# EAGLE board Aquaponics Controller (EAGLE 6.1)
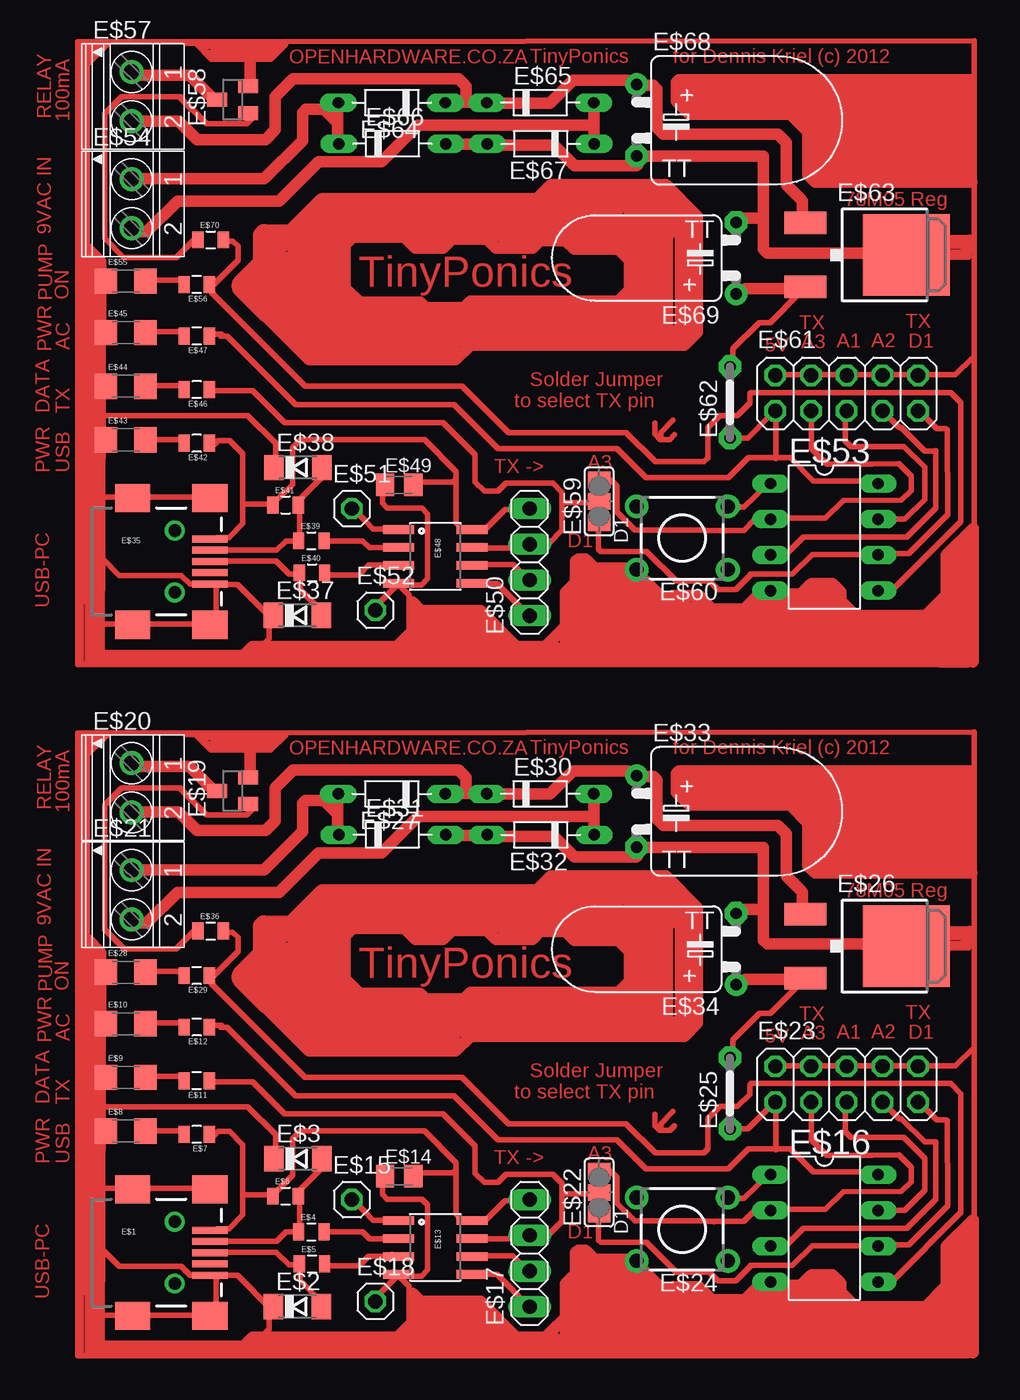
[diagram p0: board, top side]

No outline drawn. Coordinates in mm, seen from the top.
Copper layers (1*16): Top 0.035mm / dielectric 1.5mm / Bottom 0.035mm
Design rules: minimum track width 10mil, minimum drill 24mil, track to track 8mil, track to pad 8mil, pad to pad 8mil, via to via 8mil, smd to smd 8mil, copper to edge 40mil, drill to drill 8mil, minimum pad ring 10mil, minimum via ring 8mil, stop-mask expansion 4mil, vias tented up to drill 0mil, thermal gap 10mil

## Footprints (pad centres in the part's own frame; a part is rotated, then mirrored left to right if it is on the bottom)
USB-MINIB-NOSTOP = smd 2.5 x 0.5: D+ 2.5,0; D- 2.5,0.8; GND 2.5,-1.6; ID 2.5,-0.8; VBUS 2.5,1.6 | smd 2.5 x 2: G1 -3,-4.5; G2 -3,4.5; G3 2.5,4.5; G4 2.5,-4.5 | drill 0.9 pad 0.8: H1 0,2.2 | drill 0.9 pad 0.787: H2 0,-2.2
SOD80C = smd 1.4 x 1.8: A 1.7,0; C -1.7,0
0805 = smd 0.8 x 1.2: 1 -0.9,0; 2 0.9,0
1206 = smd 1.6 x 1.8: 1 -1.4,0; 2 1.4,0
SOIC8 = smd 0.61 x 2.21: 1 -1.905,-2.616; 2 -0.635,-2.616; 3 0.635,-2.616; 4 1.905,-2.616; 5 1.905,2.616; 6 0.635,2.616; 7 -0.635,2.616; 8 -1.905,2.616
C0805K = smd 1.3 x 1.6: 1 -1,0; 2 1,0
1X01 = drill 1.016 octagon: 1 0,0
DIL8 = drill 0.813 long: 1 -3.81,-3.81; 2 -1.27,-3.81; 3 1.27,-3.81; 4 3.81,-3.81; 5 3.81,3.81; 6 1.27,3.81; 7 -1.27,3.81; 8 -3.81,3.81
1X04 = drill 1.016 long: 1 -3.81,0; 2 -1.27,0; 3 1.27,0; 4 3.81,0
SOT23 = smd 1 x 1.4: 1 -0.95,-1.1; 2 0.95,-1.1; 3 0,1.1
1751248 = drill 1.1 pad 1.7: 1 -1.75,-0.1; 2 1.75,-0.1
SJ_2 = smd 1.168 x 1.6: 1 -1.524,0; 2 0,0; 3 1.524,0
2X05 = drill 1.016 octagon: 1 -5.08,-1.27; 2 -5.08,1.27; 3 -2.54,-1.27; 4 -2.54,1.27; 5 0,-1.27; 6 0,1.27; 7 2.54,-1.27; 8 2.54,1.27; 9 5.08,-1.27; 10 5.08,1.27
TL1105 = drill 1 pad 1.676: 1 -2.25,3.25; 2 2.25,3.25; 3 -2.25,-3.25; 4 2.25,-3.25
05 = drill 0.813 pad 1.6 octagon: 1 -2.54,0; 2 2.54,0
V-REG_DPACK = smd 1.6 x 3: 1 -2.28,-4.8; 3 2.28,-4.8 | smd 5.8 x 6.2: 4 0,2.38
D-7.5 = drill 0.813 long: A 3.81,0; C -3.81,0
TT5D9L = drill 0.813 pad 1.6: + -2.54,0 | drill 0.813 pad 1.6 octagon: - 2.54,0
TT5D6L = drill 0.813 pad 1.6: + -2.54,0 | drill 0.813 pad 1.6 octagon: - 2.54,0

## Placement (x,y rotation side)
E$1  [USB-MINIB-NOSTOP]  11.68,8.46 0 top
E$2  3.6V  [SOD80C]  20.4,4.62 0 top
E$3  3.6V  [SOD80C]  20.44,15.14 0 top
E$4  68R  [0805]  21.39,9.93 0 top
E$5  68R  [0805]  21.43,7.65 0 top
E$6  2k2  [0805]  19.56,12.48 0 top
E$7  [0805]  13.25,16.87 180 top
E$8  [1206]  8.2,17.11 0 top
E$9  [1206]  8.2,20.92 0 top
E$10  [1206]  8.2,24.73 0 top
E$11  [0805]  13.25,20.68 180 top
E$12  [0805]  13.25,24.49 180 top
E$13  ATTiny85  [SOIC8]  30.21,8.83 270 top
E$14  100pF  [C0805K]  27.64,13.9 0 top
E$15  [1X01]  24.27,12.22 0 top
E$16  [DIL8]  57.88,10.19 270 top
E$17  [1X04]  36.92,8.42 90 top
E$18  [1X01]  25.95,4.99 0 top
E$19  [SOT23]  15.8,41.3 90 top
E$20  [1751248]  8.71,41.52 270 top
E$21  [1751248]  8.71,33.9 270 top
E$22  [SJ_2]  41.86,12.73 90 top
E$23  [2X05]  59.47,20.43 0 top
E$24  [TL1105]  47.77,10.12 90 top
E$25  [05]  51.16,19.78 90 top
E$26  [V-REG_DPACK]  61.33,30.26 270 top
E$27  [D-7.5]  27.12,41.08 180 top
E$28  [1206]  8.2,28.39 0 top
E$29  [0805]  13.25,28.15 180 top
E$30  [D-7.5]  37.67,41.08 0 top
E$31  [D-7.5]  27.16,38.16 0 top
E$32  [D-7.5]  37.71,38.16 180 top
E$33  [TT5D9L]  44.53,39.83 270 top
E$34  [TT5D6L]  51.59,30.04 90 top
E$35  [USB-MINIB-NOSTOP]  11.68,57.6 0 top
E$36  [0805]  14.23,31.33 0 top
E$37  3.6V  [SOD80C]  20.4,53.77 0 top
E$38  3.6V  [SOD80C]  20.44,64.28 0 top
E$39  68R  [0805]  21.39,59.08 0 top
E$40  68R  [0805]  21.43,56.8 0 top
E$41  2k2  [0805]  19.56,61.62 0 top
E$42  [0805]  13.25,66.02 180 top
E$43  [1206]  8.2,66.26 0 top
E$44  [1206]  8.2,70.07 0 top
E$45  [1206]  8.2,73.88 0 top
E$46  [0805]  13.25,69.83 180 top
E$47  [0805]  13.25,73.64 180 top
E$48  ATTiny85  [SOIC8]  30.21,57.97 270 top
E$49  100pF  [C0805K]  27.64,63.04 0 top
E$50  [1X04]  36.92,57.56 90 top
E$51  [1X01]  24.27,61.37 0 top
E$52  [1X01]  25.95,54.14 0 top
E$53  [DIL8]  57.88,59.34 270 top
E$54  [1751248]  8.71,83.05 270 top
E$55  [1206]  8.2,77.54 0 top
E$56  [0805]  13.25,77.3 180 top
E$57  [1751248]  8.71,90.66 270 top
E$58  [SOT23]  15.8,90.45 90 top
E$59  [SJ_2]  41.86,61.88 90 top
E$60  [TL1105]  47.77,59.27 90 top
E$61  [2X05]  59.47,69.58 0 top
E$62  [05]  51.16,68.92 90 top
E$63  [V-REG_DPACK]  61.33,79.4 270 top
E$64  [D-7.5]  27.12,90.23 180 top
E$65  [D-7.5]  37.67,90.23 0 top
E$66  [D-7.5]  27.16,87.31 0 top
E$67  [D-7.5]  37.71,87.31 180 top
E$68  [TT5D9L]  44.53,88.98 270 top
E$69  [TT5D6L]  51.59,79.18 90 top
E$70  [0805]  14.23,80.48 0 top

## Library data of the parts
E$1 E$35 = SparkFun-Connectors
E$2 E$3 E$27 E$30-E$32 E$37 E$38 E$64-E$67 = diode
E$4-E$12 E$22 E$28 E$29 E$36 E$39-E$47 E$55 E$56 E$59 E$70 = SparkFun-Passives
E$13 E$48 = SparkFun-AnalogIC
E$14 E$33 E$34 E$49 E$68 E$69 = rcl
E$15 E$17 E$18 E$23 E$50-E$52 E$61 = pinhead
E$16 E$53 = microchip
E$19 E$58 = transistor-npn
E$20 E$21 E$54 E$57 = con-phoenix-350
E$24 E$60 = switch
E$25 E$62 = jumper
E$26 E$63 = SparkFun-PowerIC

## Tracks (layer width: path | path; a pad name or v marks a point on that pad's centre or on a via)
S$1
  Top 0.406: 6.51,24.6 6.51,8.7 7.73,7.47 12.15,7.47 12.76,6.86 13.23,6.86
S$2
  Top 0.406: 14.69,10.16 15.53,10.16 16.52,11.14 16.52,16.13 15.58,17.07 14.78,17.07 14.5,16.79
S$3
  Top 0.406: 10.13,17.36 10.08,17.26
S$4
  Top 0.406: 12.34,20.98 9.99,20.98 9.94,20.93
S$5
  Top 0.406: 12.2,24.79 9.89,24.79 9.8,24.7
S$6
  Top 0.406: 12.29,17.12 9.85,17.12 9.8,17.17
S$7
  Top 0.406: 6.51,9.78 6.51,1.94
S$8
  Top 0.406: 15.02,9.26 18.93,9.26 19.6,9.93 20.46,9.93 20.5,9.97
S$9
  Top 0.406: 14.7,8.48 18.9,8.48 19.8,7.58 20.58,7.58
S$10
  Top 0.406: 16.51,12.55 18.54,12.55 18.58,12.6
S$11
  Top 0.406: 20.54,12.52 20.54,10.28 20.58,10.24
S$12
  Top 0.406: 6.64,18.82 16.85,18.82 18.86,16.87 18.86,15.34 18.93,15.26
S$13
  Top 0.406: 20.66,12.6 20.66,12.99 22.15,14.48
S$14
  Top 0.406: 15.17,6.83 16.15,6.83 18.54,4.44
S$15
  Top 0.406: 20.58,7.42 20.58,6.48 22.03,5.03
S$16
  Top 0.406: 18.67,4.41 18.6,4.01
S$17
  Top 0.406: 6.52,1.98 17.36,1.98 | 17.36,1.98 18.38,3 18.38,4.18 18.47,4.27 | 17.36,1.98 26.8,1.98 28.36,3.54 28.36,6.06 27.61,6.81
S$18
  Top 0.406: 22.52,7.51 24.77,7.51 25.46,8.2 26.99,8.2 27.12,8.33
S$19
  Top 0.406: 22.42,9.93 25.03,9.93 25.52,9.44 27.03,9.44
S$20
  Top 0.406: 18.57,12.71 18.83,12.71 20.07,13.95 20.07,16.56 20.63,17.11 29.44,17.11 31.7,14.86 31.7,11.2 32.02,10.88
S$21
  Top 0.406: 28.09,6.78 29.22,6.78 29.64,7.25 29.64,11.85 29.27,12.26 26.79,12.26 26.45,12.6 26.45,13.45 26.56,13.56
S$22
  Top 0.406: 28.82,14.12 31.47,14.12 31.59,14.24
S$23
  Top 0.406: 25.74,5.04 27.44,6.74
S$24
  Top 0.406: 26.92,10.77 25.79,10.77 25.2,11.36 | 25.2,11.36 | 25.2,11.36 24.81,11.75
S$25
  Top 0.406: 33.49,10.76 33.78,10.76 35.17,12.15 36.86,12.15 36.94,12.23
S$26
  Top 0.406: 33.35,9.43 36.7,9.43 36.97,9.7
S$27
  Top 0.406: 33.65,8.23 35.74,8.23 36.86,7.12
S$28
  Top 0.406: 33.57,6.9 34.6,6.9 36.91,4.59
S$29
  Top 0.406: 14.2,20.62 17.2,20.62 19.48,18.34 30.77,18.34 33.05,16.06 33.05,14.11 33.7,13.46 34.67,13.46 35.24,14.03 38.57,14.03 39.23,13.38 39.23,10.69 38.25,9.71 36.63,9.71 36.46,9.88
S$30
  Top 0.406: 51.06,12.32 52.16,12.32 53.8,13.9
S$31
  Top 0.406: 21.01,1.12 4.79,1.12 4.79,45.43 68.54,45.48 68.54,1.17 5.01,1.12 5.01,5.64 5.17,5.64 5.17,45.37 5.45,45.37 5.45,1.28 5.55,1.28 5.55,7.28
S$32
  Top 0.406: 44.56,5.55 41.03,1.48
S$33
  Top 0.406: 6.5,1.66 6.52,2.28
S$34
  Top 0.406: 7.29,1.68 6.55,1.68 6.53,1.66 6,1.66 5.84,1.81 5.84,26.23
S$35
  Top 0.813: 5.27,30.7 5.52,30.45 6.05,29.64 6.08,29.6 6.08,29.14
S$36
  Top 0.406: 6.23,26.43 6.23,25.61 6.14,25.52
S$37
  Top 0.406: 12.09,41.5 7.9,41.5 6.69,40.29 6.69,31.44 8.05,30.08
S$38
  Top 0.406: 6.51,28.27 6.51,12.36
S$39
  Top 0.406: 5.22,43.33 5.22,43.58 6.95,45.31 6.42,45.31 5.47,44.37 5.47,44.72 5.97,45.22
S$40
  Top 0.406: 5.66,45.26 5.72,45.26
S$41
  Top 0.406: 12.5,45.3 13.15,45.3 14.26,44.19 18.5,44.19 19.55,45.23 19.16,45.23 18.31,44.38 14.33,44.38 13.61,45.1 18.9,45.1 18.96,45.04 18.24,45.04 18.05,44.84 14.46,44.84 14.26,44.64 18.18,44.64 18.37,44.84
S$42
  Top 0.406: 8.51,43.11 12.66,43.11 14.62,41.15
S$43
  Top 0.406: 17.05,42.33 17.05,45 17.21,45.15
S$44
  Top 0.406: 54.2,11.46 52.94,11.46 52.16,10.68 49.5,10.68
S$45
  Top 0.813: 8.47,39.78 11.96,39.78 13.28,38.47 18.13,38.47 18.81,39.15 18.81,41.51 20.08,42.78 31.86,42.77 32.31,42.32
S$46
  Top 0.406: 12.03,41.49 13.93,39.59 16.8,39.59 17.2,39.99
S$47
  Top 0.406: 5.5,29.29 6.53,29.29
S$48
  Top 0.406: 14.62,3.96 14.62,6.61 14.69,6.69
S$49
  Top 0.406: 13.92,13.04 6.55,13.04 6.4,13.19
S$50
  Top 0.406: 14.31,4 5.69,4 5.54,4.15
S$51
  Top 0.406: 61.95,8.95 57.02,8.95 55.59,7.56 52.62,7.56
S$52
  Top 0.406: 39.23,12.64 41.81,12.64 41.89,12.72
S$53
  Top 0.406: 14.23,24.62 15.01,24.62
S$54
  Top 0.406: 12.2,28.45 9.89,28.45 9.8,28.36
S$55
  Top 0.406: 5.84,5.48 5.84,29.9
S$56
  Top 0.406: 6.23,30.09 6.23,29.28 6.14,29.18
S$57
  Top 0.406: 54.35,11.54 57.95,11.54 59.21,12.8 63.36,12.82 64.07,13.5 64.07,14.53 63.18,15.42 61.17,15.39
S$58
  Top 0.406: 61.8,11.46 63.59,11.46 65.01,12.88 65.01,15.16 63.52,16.65 62.35,16.65
S$59
  Top 0.406: 54.04,8.95 55.13,8.95 56.39,10.2 63.6,10.2 63.76,10.2 63.91,10.37 65.79,12.25 65.79,16.33 | 65.79,16.33 65.79,16.34 | 65.79,16.33 65.01,16.33 63.36,17.98 63.21,17.98 62.03,19.16
S$60
  Top 0.406: 61.87,9.02 63.88,9.02 66.66,11.8 66.6,17.85
S$61
  Top 0.406: 53.96,6.26 55.52,6.26 58.03,3.75 64.38,3.75 66.34,5.71 66.34,7.99 67.36,9.01 67.36,1.86 67.05,1.55 50.36,1.55 50.36,3.52 52.94,6.1 54.43,6.1 54.51,6.18
S$62
  Top 0.813: 67.22,1.34 5.9,1.34 5.73,1.51
S$63
  Top 0.813: 5.81,1.64 5.91,1.53 6.14,1.53 6.31,1.7 6.42,29.78 5.52,30.69
S$64
  Top 0.406: 50.5,1.88 50.5,3.19 53.11,5.8
  Top 0.813: 53.11,5.8 55.28,5.8 58.01,3.08 64.26,3.08 66.66,5.48 66.66,7.93 67.04,8.31 67.04,1.94 66.93,1.83 66.93,4.33 66.55,4.71 65.74,4.71 64.43,3.41 57.3,3.41 57.14,3.24 51.1,3.24 50.77,2.92 50.93,2.92 53.22,5.21 55.01,5.21 57.08,3.13 56.38,3.13 54.8,4.71 52.67,4.71 52.46,4.5 52.46,4.06 52.13,3.73 54.96,3.73 55.18,3.95 54.2,3.95 53.98,4.17 52.46,4.17 52.19,3.9 52.19,3.57 50.99,2.37 66.6,2.37 66.6,3.84 66.33,4.12 65.84,4.12 64.64,2.92 65.68,2.92 65.73,2.97 65.73,3.19 66.17,3.62 66.17,2.75 66.22,2.7 66.22,2.21 66.66,1.77 50.93,1.77 50.72,1.99 51.42,1.99 52.24,2.81 57.52,2.81 57.63,2.92
S$65
  Top 0.406: 54.29,1.51 54.35,1.45
S$66
  Top 0.813: 66.22,4.61 60.08,4.61 59.04,5.64 59.04,6.29 58.44,6.89 57.03,6.89 55.94,5.8 56.7,5.8 57.3,6.4 58.17,6.4 58.77,5.8 58.77,5.53 60.4,3.9 64.59,3.9 64.64,3.95 58.17,3.95 56.92,5.21 57.13,5.21 57.68,5.75 57.84,5.75 59.48,4.12 58.5,4.12 58.06,4.55 58.06,4.99 57.52,5.53
S$67
  Top 0.813: 39.45,1.39 39.45,6.24 40.21,7 40.21,8.53
S$68
  Top 0.813: 43.48,7.49 41.36,7.49 41.25,7.6 41.25,4.06 | 41.25,4.06 41.25,2.97 40.65,2.37 40.65,6.02 40.76,6.13 41.14,6.13 42.01,7 | 49.63,4.88 49.63,4.11 50.23,3.52 50.12,3.52 50.01,3.62 50.01,4.01 49.79,4.22 50.12,4.22 50.28,4.06 50.28,2.97 49.68,2.37 41.63,2.37 41.47,2.53 41.47,2.97 49.84,2.97 49.95,3.08 49.95,3.3 49.68,3.57 41.74,3.57 41.25,4.06 | 41.25,4.06 41.41,4.06 41.68,4.33 49.08,4.33 49.08,4.61 48.97,4.71 41.79,4.71 41.3,5.21 41.79,5.21 42.12,5.53 47.89,5.53 48.05,5.37 45.33,5.37 45.11,5.59 41.52,5.59 41.41,5.7 41.68,5.7 42.17,6.18 44.4,6.18 44.51,6.08
S$69
  Top 0.406: 61.65,6.35 62.62,6.35 67.58,11.31
S$70
  Top 0.406: 42.36,14.13 42.21,14.29
S$71
  Top 0.406: 42.21,11.22 42.13,11.15
S$72
  Top 0.813: 56.21,6.13 56.92,6.84
S$73
  Top 0.813: 40.18,6.4 40.18,8.42 40.4,8.64 40.88,8.64 41.54,7.99 44.26,7.99 45.02,7.22 46.76,5.48 46.76,5.7 47.09,6.02 48.94,6.02 49.87,5.1 52.91,5.1 53.08,5.26
S$74
  Top 0.813: 48.7,5.31 49.19,5.31 49.79,4.71 51.2,4.71 50.12,3.63 50.12,2.1 49.9,1.88 40.16,1.88 40.05,1.99 40.05,5.86 40.81,6.62 40.81,8.04 41.03,8.26
S$75
  Top 0.813: 48.05,5.97 45,5.97
S$76
  Top 0.406: 41.81,10.98 41.81,9.35 41.97,9.18 45.24,9.18 47.36,7.06 49.7,7.06 50.3,6.46 51.59,6.46 52.62,7.49
S$77
  Top 0.813: 45.13,6.24 44.86,6.24 43.88,7.22
S$78
  Top 0.813: 43.66,6.57 42.3,6.57 41.97,6.89 43.44,6.89 43.5,6.84
S$79
  Top 0.813: 54.09,5.91 54.41,5.91 54.5,5.82 53.59,5.82 53.28,6.14 56.68,6.14 57.17,6.63
S$80
  Top 0.813: 39.88,4.2 39.82,4.2 38.05,2.43 35.96,2.43 33.41,4.98 29.16,4.98 28.58,5.57 28.58,3.41 27.07,1.91 27.66,1.91 29.43,3.67 29.43,4.2 29.3,4.33 33.02,4.33 34.85,2.5 35.44,2.5 36.29,1.65 38.64,1.65 39.16,2.17 39.03,2.17 38.9,2.3 38.64,2.3 38.44,2.1 28.71,2.1 28.45,1.84 28.45,1.97 28.9,2.43 28.9,2.56 29.88,3.54 32.95,3.54 34.13,2.36 29.69,2.36 29.49,2.56 31.12,2.56 31.32,2.76 | 31.32,2.76 33.41,2.76 | 31.32,2.76 31.06,2.76 30.8,3.02 30.27,3.02
S$81
  Top 0.813: 28.18,2.43 17.21,2.43 16.42,1.65
S$82
  Top 0.813: 62.97,1.91 65.58,1.91 66.15,1.33 68.06,1.33 68.24,1.51 67.83,1.51 65.02,4.32 65.02,4.55 66.56,6.09 66.56,8.9 68.47,10.81 68.47,1.37 68.42,1.33 68.42,1.55 67.88,2.1 67.88,9.13 | 67.88,9.63 67.88,9.13 | 67.88,9.13 67.7,8.95
S$83
  Top 0.813: 5.85,1.78 27.55,1.78 27.79,2.02
S$84
  Top 0.406: 42.09,14.25 42.71,14.25 43.13,13.83 43.13,11.96 44.41,10.71 49.39,10.71 50.03,10.65
S$85
  Top 0.406: 14.94,24.48 15.4,24.48 20.27,19.61 31.54,19.61 34.68,16.47 43.14,16.47 45.18,14.43 51.06,14.43 52.47,15.85 55.45,15.85 57.09,14.2 61.64,14.2 61.8,14.04
S$86
  Top 0.406: 67.59,11.3 67.59,19.76 66.87,20.48 52.65,20.48
S$87
  Top 0.406: 56.78,21.73 67.2,21.73 68.46,22.99
S$88
  Top 0.406: 61.25,15.38 58.04,15.38 56.94,16.48 56.94,18.92 57.09,19.08
S$89
  Top 0.406: 62.5,16.64 59.76,16.64 59.37,17.04 59.37,18.92 59.6,19.16
S$90
  Top 0.406: 66.5,17.9 65.87,17.9 64.7,19.08
S$91
  Top 0.406: 54.43,15.78 54.43,18.79 54.1,19.11
S$92
  Top 0.406: 54.1,21.73 56.91,21.73 57.04,21.86
S$93
  Top 0.406: 14.26,28 14.26,27.61 20.94,20.93 32.12,20.93 35.42,17.63 43.78,17.63 45.86,15.56
S$94
  Top 0.813: 19.81,31.38 22.54,34.12 37.3,34.12 38.43,35.25 46.6,35.25 48.87,32.98 48.87,24.78 47.93,23.84 32.7,23.84 31.66,22.81 21.23,22.81 16.14,27.89
S$95
  Top 0.406: 45.81,18.29 45.81,17.52 46.19,17.14 46.9,17.14 47.23,17.47
S$96
  Top 0.406: 46.25,17.41 46.25,17.63 47.12,18.5
S$97
  Top 1.422: 20.34,30.82 21.44,31.91
S$98
  Top 0.813: 23.79,30.97 23.79,27.91 24.81,26.89 29.12,26.89 29.75,26.27 32.02,26.27 32.73,26.97 43.22,26.97 44.01,27.75 44.01,29.88 43.23,30.66 40.09,30.66 39.46,31.29 37.66,31.29 37.11,30.74 34.53,30.74 33.9,31.36 31.39,31.36 30.77,30.74 28.81,30.74 28.02,31.52 24.34,31.52 24.03,31.21
S$99
  Top 0.813: 28.34,31.91 28.57,31.91 29.12,31.36 30.37,31.36 30.92,31.91 34.53,31.91 34.92,31.52 37.27,31.52 37.35,31.6 38.21,31.6 38.68,32.07 39.54,32.07 40.33,31.29 43.69,31.29 44.56,30.42 44.56,27.44 43.62,26.5 25.52,26.5 25.2,26.19
S$100
  Top 0.406: 45.86,15.55 49.32,15.55 49.6,15.83 49.6,17.99 50.45,18.85 51.7,18.85 52.57,19.72 52.57,20.4 52.66,20.49
S$101
  Top 0.406: 51.02,17.25 52.43,17.25 54.01,18.83
S$102
  Top 0.406: 51.38,22.47 51.38,23.58 53.26,25.46 54.03,25.46 56.08,27.5
S$103
  Top 0.406: 65.56,29.16 65.56,28.67
S$104
  Top 0.406: 65.79,31.12 68.22,31.12
S$105
  Top 0.406: 66.5,30.88 68.3,30.88
S$106
  Top 0.406: 66.5,30.44 68.18,30.44
S$107
  Top 0.406: 66.06,30.11 68.13,30.11 68.18,30.17
S$108
  Top 0.406: 67.75,30.66 68.18,30.66
S$109
  Top 0.406: 66.98,31.15 68.18,31.15 68.29,31.26
S$110
  Top 0.406: 66.11,31.47 68.18,31.47 68.24,31.53
S$111
  Top 0.813: 41.51,38.11 41.51,41.1 41.47,41.14 | 33.94,38.13 30.94,38.13 | 30.92,41.1 33.91,41.1
S$112
  Top 0.813: 23.24,37.96 23.24,41
S$113
  Top 0.813: 14.28,41.45 14.28,41.49 12.73,43.04 8.58,43.04 8.54,43
S$114
  Top 0.813: 17.04,42.29 17.04,44.1 16.89,44.25
S$115
  Top 0.813: 32.41,41.12 32.41,42.26 31.93,42.74
S$116
  Top 0.813: 8.61,35.67 18.04,35.67 20.77,38.39 20.77,40.39 20.99,40.62 22.3,40.61 23.11,39.79
S$117
  Top 0.813: 8.84,31.91 9.7,31.91 11.88,34.08 19.09,34.08 21.9,36.9 26.38,36.89 28.97,39.48 41.3,39.48 41.39,39.57
S$118
  Top 0.813: 33.85,41.06 38.37,41.06 40,42.69 43.87,42.69 44.63,41.93
S$119
  Top 0.813: 34.07,38.06 38.64,38.06 40.11,36.59 44.52,36.59 44.58,36.65
S$120
  Top 0.813: 61.56,30.4 53.83,30.4 53.56,30.67 53.56,37.29 44.53,37.28
S$121
  Top 0.813: 56.49,32.52 56.39,32.41
S$122
  Top 0.813: 56.48,27.87 52.25,27.87 51.59,27.21
S$123
  Top 0.813: 53.48,32.87 51.78,32.87 51.59,32.68
S$124
  Top 0.813: 23.48,31.91 43.7,31.91 44.24,31.36
S$125
  Top 0.813: 22.93,32.23 43.85,32.23 45.11,30.97
S$126
  Top 0.813: 44.71,26.03 19.8,26.03 18.93,26.89
S$127
  Top 0.813: 24.66,26.27 24.42,26.27 22.85,27.83
S$128
  Top 0.813: 22.77,31.99 22.77,28.46 23.09,28.15
S$129
  Top 0.813: 23.4,31.6 23.4,28.3 23.64,28.07
S$130
  Top 0.813: 23.56,26.34 23.56,26.58 22.3,27.83
S$131
  Top 0.813: 21.6,25.64 44.56,25.64 45.11,26.19 45.11,31.76 45.34,31.99
S$132
  Top 0.813: 44.09,26.81 44.79,26.81 45.03,26.58
S$133
  Top 0.813: 22.46,32.78 45.26,32.78 45.89,32.15
S$134
  Top 0.813: 44.48,32.38 45.34,31.52
S$135
  Top 1.422: 42.83,33.33 23.09,33.33 22.15,32.38 22.15,27.28 22.85,26.58 22.85,25.71 23.48,25.09 45.03,25.09 45.73,25.79 45.73,34.19 45.66,34.27 38.13,34.27 37.98,34.11 43.69,34.11 44.79,33.01 44.79,33.09 46.12,34.42 47.93,32.62 47.93,25.01 47.38,24.46 31.63,24.46 31.47,24.3
S$136
  Top 1.422: 46.44,25.09 46.44,31.76 46.75,32.07
S$137
  Top 1.422: 46.59,33.64 46.59,31.91
S$138
  Top 1.422: 31.39,23.36 21.76,23.36 16.98,28.15
S$139
  Top 1.422: 21.05,30.97 21.05,26.73 | 21.05,26.73 21.05,25.71 22.3,24.46 30.45,24.46 31,23.91 | 21.99,26.34 21.44,26.34 21.05,26.73
S$140
  Top 1.422: 20.66,25.71 20.43,25.71 17.6,28.54
S$141
  Top 1.27: 21.34,26.02 18.29,26.02 16.38,27.93 16.38,28.19 22.22,34.04 41.14,34.04 41.29,33.88
S$142
  Top 1.422: 20.34,28.15 20.19,28.15
S$143
  Top 1.422: 19.01,29.8 19.87,29.8 20.42,29.25
S$144
  Top 0.813: 44.5,42.32 45.7,42.32 45.97,42.05 45.97,39.29 46.42,38.84 54.58,38.84 55.19,38.24 55.19,35.25 56.24,34.19
S$145
  Top 0.813: 56.47,32.79 56.51,32.76
S$146
  Top 0.813: 56.32,32.76 56.32,34.08 56.24,34.16
S$147
  Top 0.813: 47.57,42.7 68.28,42.7 68.3,42.73
S$148
  Top 0.813: 68.35,35.45 57.23,35.45 56.72,35.95 56.72,39.01 55.45,40.28 48.27,40.28 47.37,41.17 47.37,42.54 47.53,42.7 47.53,41.83 48.57,40.79 48.57,41.42 47.99,42.01 68.05,42.01 68.08,41.97 68.08,36.05 68.04,36 57.51,36 57.2,36.31 57.2,39.24 55.7,40.74 49.23,40.74 49.01,40.96 49.01,41.4 67.58,41.4 67.67,41.31 67.67,36.63 67.58,36.55 58.03,36.55 57.75,36.83 57.75,40.16 57.12,40.79 56.31,40.79 56.22,40.88 56.31,40.88 57.27,39.91 57.27,40.53 57.57,40.83 67.08,40.83 67.08,37.12 67.12,37.07 58.36,37.07 58.21,37.23 58.21,40.2 66.4,40.2 66.47,40.13 66.47,37.69 66.4,37.62 58.78,37.62 58.69,37.53 58.69,39.59 65.81,39.59 65.97,39.43 65.97,38.25 58.86,38.25 58.71,38.1 58.71,38.58 58.97,38.84 65.64,38.84 65.75,38.95 64.44,38.95 64.41,38.97
S$149
  Top 0.406: 14.2,28.15 14.24,28.12
S$150
  Top 0.406: 8.05,30.05 11.78,30.05 13.07,31.35
S$151
  Top 0.406: 15.34,31.24 15.81,31.24 16.17,30.88 16.17,29.9 14.46,28.19
S$152
  Top 1.27: 19.32,29.07 18.7,29.07 18.34,28.71
S$153
  Top 1.27: 18.6,28.86 20.36,27.1
S$154
  Top 1.27: 17.88,28.97 17.88,31.66 18.03,31.81 20.82,31.81 21.18,32.17
S$155
  Top 0.406: 6.51,73.75 6.51,57.84 7.73,56.62 12.15,56.62 12.76,56.01 13.23,56.01
S$156
  Top 0.406: 14.69,59.3 15.53,59.3 16.52,60.29 16.52,65.28 15.58,66.22 14.78,66.22 14.5,65.94
S$157
  Top 0.406: 10.13,66.5 10.08,66.41
S$158
  Top 0.406: 12.34,70.12 9.99,70.12 9.94,70.08
S$159
  Top 0.406: 12.2,73.94 9.89,73.94 9.8,73.84
S$160
  Top 0.406: 12.29,66.27 9.85,66.27 9.8,66.31
S$161
  Top 0.406: 6.51,58.92 6.51,51.08
S$162
  Top 0.406: 15.02,58.41 18.93,58.41 19.6,59.07 20.46,59.07 20.5,59.11
S$163
  Top 0.406: 14.7,57.62 18.9,57.62 19.8,56.72 20.58,56.72
S$164
  Top 0.406: 16.51,61.7 18.54,61.7 18.58,61.74
S$165
  Top 0.406: 20.54,61.66 20.54,59.43 20.58,59.39
S$166
  Top 0.406: 6.64,67.96 16.85,67.96 18.86,66.01 18.86,64.48 18.93,64.41
S$167
  Top 0.406: 20.66,61.74 20.66,62.13 22.15,63.62
S$168
  Top 0.406: 15.17,55.98 16.15,55.98 18.54,53.59
S$169
  Top 0.406: 20.58,56.57 20.58,55.62 22.03,54.17
S$170
  Top 0.406: 18.67,53.55 18.6,53.15
S$171
  Top 0.406: 6.52,51.12 17.36,51.12 | 17.36,51.12 18.38,52.15 18.38,53.32 18.47,53.41 | 17.36,51.12 26.8,51.12 28.36,52.69 28.36,55.2 27.61,55.95
S$172
  Top 0.406: 22.52,56.66 24.77,56.66 25.46,57.34 26.99,57.34 27.12,57.47
S$173
  Top 0.406: 22.42,59.07 25.03,59.07 25.52,58.58 27.03,58.58
S$174
  Top 0.406: 18.57,61.85 18.83,61.85 20.07,63.09 20.07,65.7 20.63,66.26 29.44,66.26 31.7,64 31.7,60.35 32.02,60.02
S$175
  Top 0.406: 28.09,55.93 29.22,55.93 29.64,56.4 29.64,60.99 29.27,61.41 26.79,61.41 26.45,61.74 26.45,62.59 26.56,62.7
S$176
  Top 0.406: 28.82,63.27 31.47,63.27 31.59,63.38
S$177
  Top 0.406: 25.74,54.19 27.44,55.88
S$178
  Top 0.406: 26.92,59.92 25.79,59.92 25.2,60.51 | 25.2,60.51 | 25.2,60.51 24.81,60.89
S$179
  Top 0.406: 33.49,59.91 33.78,59.91 35.17,61.3 36.86,61.3 36.94,61.38
S$180
  Top 0.406: 33.35,58.58 36.7,58.58 36.97,58.85
S$181
  Top 0.406: 33.65,57.38 35.74,57.38 36.86,56.26
S$182
  Top 0.406: 33.57,56.05 34.6,56.05 36.91,53.73
S$183
  Top 0.406: 14.2,69.76 17.2,69.76 19.48,67.48 30.77,67.48 33.05,65.21 33.05,63.25 33.7,62.6 34.67,62.6 35.24,63.17 38.57,63.17 39.23,62.52 39.23,59.83 38.25,58.86 36.63,58.86 36.46,59.02
S$184
  Top 0.406: 6.5,50.81 6.52,51.43
S$185
  Top 0.406: 7.29,50.82 6.55,50.82 6.53,50.8 6,50.8 5.84,50.96 5.84,75.38
S$186
  Top 0.406: 6.23,75.57 6.23,74.76 6.14,74.67
S$187
  Top 0.406: 14.23,73.77 15.01,73.77
S$188
  Top 0.406: 6.51,77.41 6.51,61.5
S$189
  Top 0.406: 12.2,77.6 9.89,77.6 9.8,77.5
S$190
  Top 0.406: 5.84,54.62 5.84,79.04
S$191
  Top 0.406: 6.23,79.23 6.23,78.42 6.14,78.33
S$192
  Top 0.813: 5.27,79.84 5.52,79.59 6.05,78.78 6.08,78.75 6.08,78.28
S$193
  Top 0.813: 67.22,50.48 5.9,50.48 5.73,50.65
S$194
  Top 0.813: 5.81,50.78 5.91,50.68 6.14,50.68 6.31,50.85 6.42,78.93 5.52,79.83
S$195
  Top 0.406: 5.5,78.44 6.53,78.44
S$196
  Top 0.406: 21.01,50.26 4.79,50.26 4.79,94.57 68.54,94.63 68.54,50.32 5.01,50.26 5.01,54.79 5.17,54.79 5.17,94.52 5.45,94.52 5.45,50.43 5.55,50.43 5.55,56.42
S$197
  Top 0.406: 5.66,94.41 5.72,94.41
S$198
  Top 0.406: 8.51,92.26 12.66,92.26 14.62,90.29
S$199
  Top 0.406: 17.05,91.47 17.05,94.14 17.21,94.3
S$200
  Top 0.406: 12.03,90.64 13.93,88.74 16.8,88.74 17.2,89.13
S$201
  Top 0.406: 14.2,77.3 14.24,77.26
S$202
  Top 0.406: 12.09,90.64 7.9,90.64 6.69,89.43 6.69,80.59 8.05,79.23
S$203
  Top 0.406: 5.22,92.47 5.22,92.73 6.95,94.46 6.42,94.46 5.47,93.51 5.47,93.86 5.97,94.36
S$204
  Top 0.406: 12.5,94.44 13.15,94.44 14.26,93.33 18.5,93.33 19.55,94.38 19.16,94.38 18.31,93.53 14.33,93.53 13.61,94.25 18.9,94.25 18.96,94.18 18.24,94.18 18.05,93.98 14.46,93.98 14.26,93.79 18.18,93.79 18.37,93.98
S$205
  Top 0.406: 13.92,62.18 6.55,62.18 6.4,62.34
S$206
  Top 0.406: 14.31,53.14 5.69,53.14 5.54,53.3
S$207
  Top 0.406: 14.62,53.11 14.62,55.76 14.69,55.83
S$208
  Top 0.406: 54.29,50.66 54.35,50.59
S$209
  Top 0.406: 51.06,61.47 52.16,61.47 53.8,63.04
S$210
  Top 0.406: 44.56,54.7 41.03,50.62
S$211
  Top 0.406: 42.36,63.28 42.21,63.43
S$212
  Top 0.406: 54.2,60.6 52.94,60.6 52.16,59.82 49.5,59.82
S$213
  Top 0.406: 42.21,60.37 42.13,60.29
S$214
  Top 0.406: 61.95,58.09 57.02,58.09 55.59,56.71 52.62,56.71
S$215
  Top 0.406: 39.23,61.78 41.81,61.78 41.89,61.86
S$216
  Top 0.406: 54.35,60.68 57.95,60.68 59.21,61.94 63.36,61.97 64.07,62.65 64.07,63.67 63.18,64.56 61.17,64.53
S$217
  Top 0.406: 61.8,60.6 63.59,60.6 65.01,62.02 65.01,64.3 63.52,65.79 62.35,65.79
S$218
  Top 0.406: 54.04,58.09 55.13,58.09 56.39,59.35 63.6,59.35 63.76,59.35 63.91,59.51 65.79,61.39 65.79,65.47 | 65.79,65.47 65.79,65.48 | 65.79,65.47 65.01,65.47 63.36,67.12 63.21,67.12 62.03,68.3
S$219
  Top 0.406: 53.96,55.4 55.52,55.4 58.03,52.89 64.38,52.89 66.34,54.85 66.34,57.13 67.36,58.15 67.36,51.01 67.05,50.7 50.36,50.7 50.36,52.66 52.94,55.25 54.43,55.25 54.51,55.33
S$220
  Top 0.406: 50.5,51.02 50.5,52.34 53.11,54.95
  Top 0.813: 53.11,54.95 55.28,54.95 58.01,52.22 64.26,52.22 66.66,54.62 66.66,57.08 67.04,57.46 67.04,51.08 66.93,50.97 66.93,53.48 66.55,53.86 65.74,53.86 64.43,52.55 57.3,52.55 57.14,52.39 51.1,52.39 50.77,52.06 50.93,52.06 53.22,54.35 55.01,54.35 57.08,52.28 56.38,52.28 54.8,53.86 52.67,53.86 52.46,53.64 52.46,53.2 52.13,52.88 54.96,52.88 55.18,53.1 54.2,53.1 53.98,53.31 52.46,53.31 52.19,53.04 52.19,52.71 50.99,51.52 66.6,51.52 66.6,52.99 66.33,53.26 65.84,53.26 64.64,52.06 65.68,52.06 65.73,52.12 65.73,52.33 66.17,52.77 66.17,51.9 66.22,51.84 66.22,51.35 66.66,50.92 50.93,50.92 50.72,51.13 51.42,51.13 52.24,51.95 57.52,51.95 57.63,52.06
S$221
  Top 0.813: 66.22,53.75 60.08,53.75 59.04,54.78 59.04,55.44 58.44,56.04 57.03,56.04 55.94,54.95 56.7,54.95 57.3,55.55 58.17,55.55 58.77,54.95 58.77,54.67 60.4,53.04 64.59,53.04 64.64,53.1 58.17,53.1 56.92,54.35 57.13,54.35 57.68,54.89 57.84,54.89 59.48,53.26 58.5,53.26 58.06,53.7 58.06,54.13 57.52,54.68
S$222
  Top 0.813: 56.21,55.28 56.92,55.98
S$223
  Top 0.813: 39.45,50.53 39.45,55.39 40.21,56.15 40.21,57.67
S$224
  Top 0.813: 48.7,54.46 49.19,54.46 49.79,53.86 51.2,53.86 50.12,52.77 50.12,51.24 49.9,51.02 40.16,51.02 40.05,51.13 40.05,55 40.81,55.77 40.81,57.18 41.03,57.4
S$225
  Top 0.813: 48.05,55.11 45,55.11
S$226
  Top 0.813: 43.48,56.64 41.36,56.64 41.25,56.75 41.25,53.2 | 41.25,53.2 41.25,52.11 40.65,51.52 40.65,55.17 40.76,55.28 41.14,55.28 42.01,56.15 | 49.63,54.02 49.63,53.26 50.23,52.66 50.12,52.66 50.01,52.77 50.01,53.15 49.79,53.37 50.12,53.37 50.28,53.2 50.28,52.11 49.68,51.52 41.63,51.52 41.47,51.68 41.47,52.12 49.84,52.12 49.95,52.22 49.95,52.44 49.68,52.71 41.74,52.71 41.25,53.2 | 41.25,53.2 41.41,53.2 41.68,53.48 49.08,53.48 49.08,53.75 48.97,53.86 41.79,53.86 41.3,54.35 41.79,54.35 42.12,54.68 47.89,54.68 48.05,54.51 45.33,54.51 45.11,54.73 41.52,54.73 41.41,54.84 41.68,54.84 42.17,55.33 44.4,55.33 44.51,55.22
S$227
  Top 0.406: 61.87,58.16 63.88,58.16 66.66,60.94 66.6,66.99
S$228
  Top 0.406: 61.65,55.49 62.62,55.49 67.58,60.45
S$229
  Top 0.406: 41.81,60.13 41.81,58.49 41.97,58.33 45.24,58.33 47.36,56.2 49.7,56.2 50.3,55.6 51.59,55.6 52.62,56.64
S$230
  Top 0.813: 40.18,55.55 40.18,57.57 40.4,57.78 40.88,57.78 41.54,57.13 44.26,57.13 45.02,56.37 46.76,54.62 46.76,54.84 47.09,55.17 48.94,55.17 49.87,54.24 52.91,54.24 53.08,54.41
S$231
  Top 0.813: 45.13,55.39 44.86,55.39 43.88,56.37
S$232
  Top 0.813: 43.66,55.71 42.3,55.71 41.97,56.04 43.44,56.04 43.5,55.98
S$233
  Top 0.813: 54.09,55.05 54.41,55.05 54.5,54.96 53.59,54.96 53.28,55.28 56.68,55.28 57.17,55.78
S$234
  Top 0.813: 39.88,53.34 39.82,53.34 38.05,51.58 35.96,51.58 33.41,54.13 29.16,54.13 28.58,54.72 28.58,52.55 27.07,51.05 27.66,51.05 29.43,52.82 29.43,53.34 29.3,53.47 33.02,53.47 34.85,51.64 35.44,51.64 36.29,50.79 38.64,50.79 39.16,51.31 39.03,51.31 38.9,51.44 38.64,51.44 38.44,51.25 28.71,51.25 28.45,50.99 28.45,51.12 28.9,51.58 28.9,51.71 29.88,52.69 32.95,52.69 34.13,51.51 29.69,51.51 29.49,51.7 31.12,51.7 31.32,51.9 | 31.32,51.9 33.41,51.9 | 31.32,51.9 31.06,51.9 30.8,52.16 30.27,52.16
S$235
  Top 0.813: 28.18,51.58 17.21,51.58 16.42,50.79
S$236
  Top 0.813: 62.97,51.05 65.58,51.05 66.15,50.47 68.06,50.47 68.24,50.65 67.83,50.65 65.02,53.47 65.02,53.69 66.56,55.23 66.56,58.05 68.47,59.95 68.47,50.52 68.42,50.47 68.42,50.7 67.88,51.24 67.88,58.27 | 67.88,58.77 67.88,58.27 | 67.88,58.27 67.7,58.09
S$237
  Top 0.813: 5.85,50.93 27.55,50.93 27.79,51.16
S$238
  Top 0.406: 42.09,63.39 42.71,63.39 43.13,62.97 43.13,61.11 44.41,59.85 49.39,59.85 50.03,59.8
S$239
  Top 0.406: 14.94,73.63 15.4,73.63 20.27,68.76 31.54,68.76 34.68,65.62 43.14,65.62 45.18,63.58 51.06,63.58 52.47,64.99 55.45,64.99 57.09,63.34 61.64,63.34 61.8,63.18
S$240
  Top 0.406: 61.25,64.53 58.04,64.53 56.94,65.63 56.94,68.07 57.09,68.22
S$241
  Top 0.406: 62.5,65.79 59.76,65.79 59.37,66.18 59.37,68.07 59.6,68.3
S$242
  Top 0.406: 66.5,67.04 65.87,67.04 64.7,68.22
S$243
  Top 0.406: 67.59,60.44 67.59,68.91 66.87,69.63 52.65,69.63
S$244
  Top 0.406: 56.78,70.88 67.2,70.88 68.46,72.13
S$245
  Top 0.406: 54.43,64.92 54.43,67.93 54.1,68.26
S$246
  Top 0.406: 54.1,70.88 56.91,70.88 57.04,71.01
S$247
  Top 0.406: 14.26,77.15 14.26,76.75 20.94,70.08 32.12,70.08 35.42,66.78 43.78,66.78 45.86,64.7
S$248
  Top 0.406: 45.81,67.43 45.81,66.67 46.19,66.29 46.9,66.29 47.23,66.61
S$249
  Top 0.406: 46.25,66.56 46.25,66.78 47.12,67.65
S$250
  Top 0.406: 45.86,64.7 49.32,64.7 49.6,64.97 49.6,67.14 50.45,67.99 51.7,67.99 52.57,68.86 52.57,69.54 52.66,69.63
S$251
  Top 0.406: 51.02,66.39 52.43,66.39 54.01,67.97
S$252
  Top 0.406: 51.38,71.62 51.38,72.72 53.26,74.61 54.03,74.61 56.08,76.65
S$253
  Top 0.406: 65.56,78.3 65.56,77.82
S$254
  Top 0.406: 65.79,80.27 68.22,80.27
S$255
  Top 0.406: 66.5,80.03 68.3,80.03
S$256
  Top 0.406: 66.5,79.58 68.18,79.58
S$257
  Top 0.406: 66.06,79.26 68.13,79.26 68.18,79.31
S$258
  Top 0.406: 67.75,79.8 68.18,79.8
S$259
  Top 0.406: 66.98,80.29 68.18,80.29 68.29,80.4
S$260
  Top 0.406: 66.11,80.62 68.18,80.62 68.24,80.67
S$261
  Top 0.813: 41.51,87.25 41.51,90.25 41.47,90.28 | 33.94,87.28 30.94,87.28 | 30.92,90.25 33.91,90.25
S$262
  Top 0.813: 23.24,87.11 23.24,90.15
S$263
  Top 0.813: 8.47,88.93 11.96,88.93 13.28,87.61 18.13,87.61 18.81,88.29 18.81,90.65 20.08,91.92 31.86,91.92 32.31,91.46
S$264
  Top 0.813: 14.28,90.6 14.28,90.64 12.73,92.19 8.58,92.19 8.54,92.15
S$265
  Top 0.813: 17.04,91.43 17.04,93.25 16.89,93.4
S$266
  Top 0.813: 32.41,90.27 32.41,91.41 31.93,91.89
S$267
  Top 0.813: 8.61,84.82 18.04,84.82 20.77,87.54 20.77,89.53 20.99,89.76 22.3,89.75 23.11,88.94
S$268
  Top 0.813: 8.84,81.05 9.7,81.05 11.88,83.23 19.09,83.23 21.9,86.04 26.38,86.03 28.97,88.62 41.3,88.62 41.39,88.71
S$269
  Top 0.813: 33.85,90.2 38.37,90.2 40,91.84 43.87,91.84 44.63,91.07
S$270
  Top 0.813: 34.07,87.21 38.64,87.21 40.11,85.74 44.52,85.74 44.58,85.79
S$271
  Top 0.813: 61.56,79.54 53.83,79.54 53.56,79.81 53.56,86.43 44.53,86.43
S$272
  Top 0.813: 56.49,81.66 56.39,81.56
S$273
  Top 0.813: 56.48,77.02 52.25,77.02 51.59,76.36
S$274
  Top 0.813: 53.48,82.01 51.78,82.01 51.59,81.82
S$275
  Top 0.813: 19.81,80.53 22.54,83.26 37.3,83.26 38.43,84.39 46.6,84.39 48.87,82.13 48.87,73.93 47.93,72.99 32.7,72.99 31.66,71.95 21.23,71.95 16.14,77.04
S$276
  Top 0.813: 23.79,80.12 23.79,77.06 24.81,76.04 29.12,76.04 29.75,75.41 32.02,75.41 32.73,76.11 43.22,76.11 44.01,76.9 44.01,79.02 43.23,79.8 40.09,79.8 39.46,80.43 37.66,80.43 37.11,79.88 34.53,79.88 33.9,80.51 31.39,80.51 30.77,79.88 28.81,79.88 28.02,80.67 24.34,80.67 24.03,80.35
S$277
  Top 0.813: 28.34,81.06 28.57,81.06 29.12,80.51 30.37,80.51 30.92,81.06 34.53,81.06 34.92,80.67 37.27,80.67 37.35,80.75 38.21,80.75 38.68,81.22 39.54,81.22 40.33,80.43 43.69,80.43 44.56,79.57 44.56,76.58 43.62,75.64 25.52,75.64 25.2,75.33
S$278
  Top 0.813: 23.48,81.06 43.7,81.06 44.24,80.51
S$279
  Top 0.813: 22.93,81.37 43.85,81.37 45.11,80.12
S$280
  Top 0.813: 44.71,75.17 19.8,75.17 18.93,76.04
S$281
  Top 0.813: 24.66,75.41 24.42,75.41 22.85,76.98
S$282
  Top 0.813: 22.77,81.14 22.77,77.61 23.09,77.29
S$283
  Top 0.813: 23.4,80.75 23.4,77.45 23.64,77.21
S$284
  Top 0.813: 23.56,75.49 23.56,75.72 22.3,76.98
S$285
  Top 0.813: 21.6,74.78 44.56,74.78 45.11,75.33 45.11,80.9 45.34,81.14
S$286
  Top 0.813: 44.09,75.96 44.79,75.96 45.03,75.72
S$287
  Top 0.813: 22.46,81.92 45.26,81.92 45.89,81.29
S$288
  Top 0.813: 44.48,81.53 45.34,80.67
S$289
  Top 1.422: 42.83,82.47 23.09,82.47 22.15,81.53 22.15,76.43 22.85,75.72 22.85,74.86 23.48,74.23 45.03,74.23 45.73,74.94 45.73,83.33 45.66,83.41 38.13,83.41 37.98,83.26 43.69,83.26 44.79,82.16 44.79,82.24 46.12,83.57 47.93,81.77 47.93,74.15 47.38,73.61 31.63,73.61 31.47,73.45
S$290
  Top 1.422: 46.44,74.23 46.44,80.9 46.75,81.22
S$291
  Top 1.422: 46.59,82.78 46.59,81.06
S$292
  Top 1.422: 20.34,79.96 21.44,81.06
S$293
  Top 1.422: 31.39,72.51 21.76,72.51 16.98,77.29
S$294
  Top 1.422: 21.05,80.12 21.05,75.88 | 21.05,75.88 21.05,74.86 22.3,73.61 30.45,73.61 31,73.06 | 21.99,75.49 21.44,75.49 21.05,75.88
S$295
  Top 1.422: 20.66,74.86 20.43,74.86 17.6,77.69
S$296
  Top 1.422: 20.34,77.29 20.19,77.29
S$297
  Top 1.422: 19.01,78.94 19.87,78.94 20.42,78.39
S$298
  Top 0.813: 56.47,81.94 56.51,81.9
S$299
  Top 0.813: 44.5,91.46 45.7,91.46 45.97,91.2 45.97,88.44 46.42,87.98 54.58,87.98 55.19,87.38 55.19,84.39 56.24,83.34
S$300
  Top 0.813: 56.32,81.9 56.32,83.22 56.24,83.3
S$301
  Top 0.813: 47.57,91.85 68.28,91.85 68.3,91.87
S$302
  Top 0.813: 68.35,84.59 57.23,84.59 56.72,85.09 56.72,88.16 55.45,89.42 48.27,89.42 47.37,90.32 47.37,91.68 47.53,91.85 47.53,90.97 48.57,89.94 48.57,90.57 47.99,91.15 68.05,91.15 68.08,91.11 68.08,85.19 68.04,85.15 57.51,85.15 57.2,85.45 57.2,88.38 55.7,89.89 49.23,89.89 49.01,90.11 49.01,90.55 67.58,90.55 67.67,90.46 67.67,85.78 67.58,85.69 58.03,85.69 57.75,85.98 57.75,89.3 57.12,89.93 56.31,89.93 56.22,90.02 56.31,90.02 57.27,89.06 57.27,89.67 57.57,89.98 67.08,89.98 67.08,86.26 67.12,86.22 58.36,86.22 58.21,86.37 58.21,89.34 66.4,89.34 66.47,89.28 66.47,86.83 66.4,86.76 58.78,86.76 58.69,86.68 58.69,88.73 65.81,88.73 65.97,88.58 65.97,87.4 58.86,87.4 58.71,87.25 58.71,87.73 58.97,87.99 65.64,87.99 65.75,88.1 64.44,88.1 64.41,88.12
S$303
  Top 0.406: 8.05,79.2 11.78,79.2 13.07,80.49
S$304
  Top 0.406: 15.34,80.39 15.81,80.39 16.17,80.03 16.17,79.04 14.46,77.33
S$305
  Top 1.27: 21.34,75.16 18.29,75.16 16.38,77.08 16.38,77.34 22.22,83.18 41.14,83.18 41.29,83.03
S$306
  Top 1.27: 19.32,78.21 18.7,78.21 18.34,77.85
S$307
  Top 1.27: 18.6,78.01 20.36,76.25
S$308
  Top 1.27: 17.88,78.11 17.88,80.8 18.03,80.96 20.82,80.96 21.18,81.32

## Text on the board
Top: OPENHARDWARE.CO.ZA | TinyPonics | for Dennis Kriel (c) 2012 | RELAY | 100mA | 78M05 Reg | 9VAC IN | TinyPonics | PUMP | ON | TX | TX | PWR | AC | 5V | A3 | A1 | A2 | D1 | Solder Jumper | to select TX pin | DATA | TX | PWR | USB | TX -> | A3 | D1 | USB-PC | OPENHARDWARE.CO.ZA | TinyPonics | for Dennis Kriel (c) 2012 | RELAY | 100mA | 78M05 Reg | 9VAC IN | TinyPonics | PUMP | ON | TX | TX | AC | A3 | A1 | A2 | D1 | PWR | 5V | Solder Jumper | DATA | TX | to select TX pin | PWR | USB | TX -> | A3 | D1 | USB-PC
tPlace: D1 | D1